# EAGLE board Cansat-2024-1 (EAGLE 9.4.2), part 1 of 2
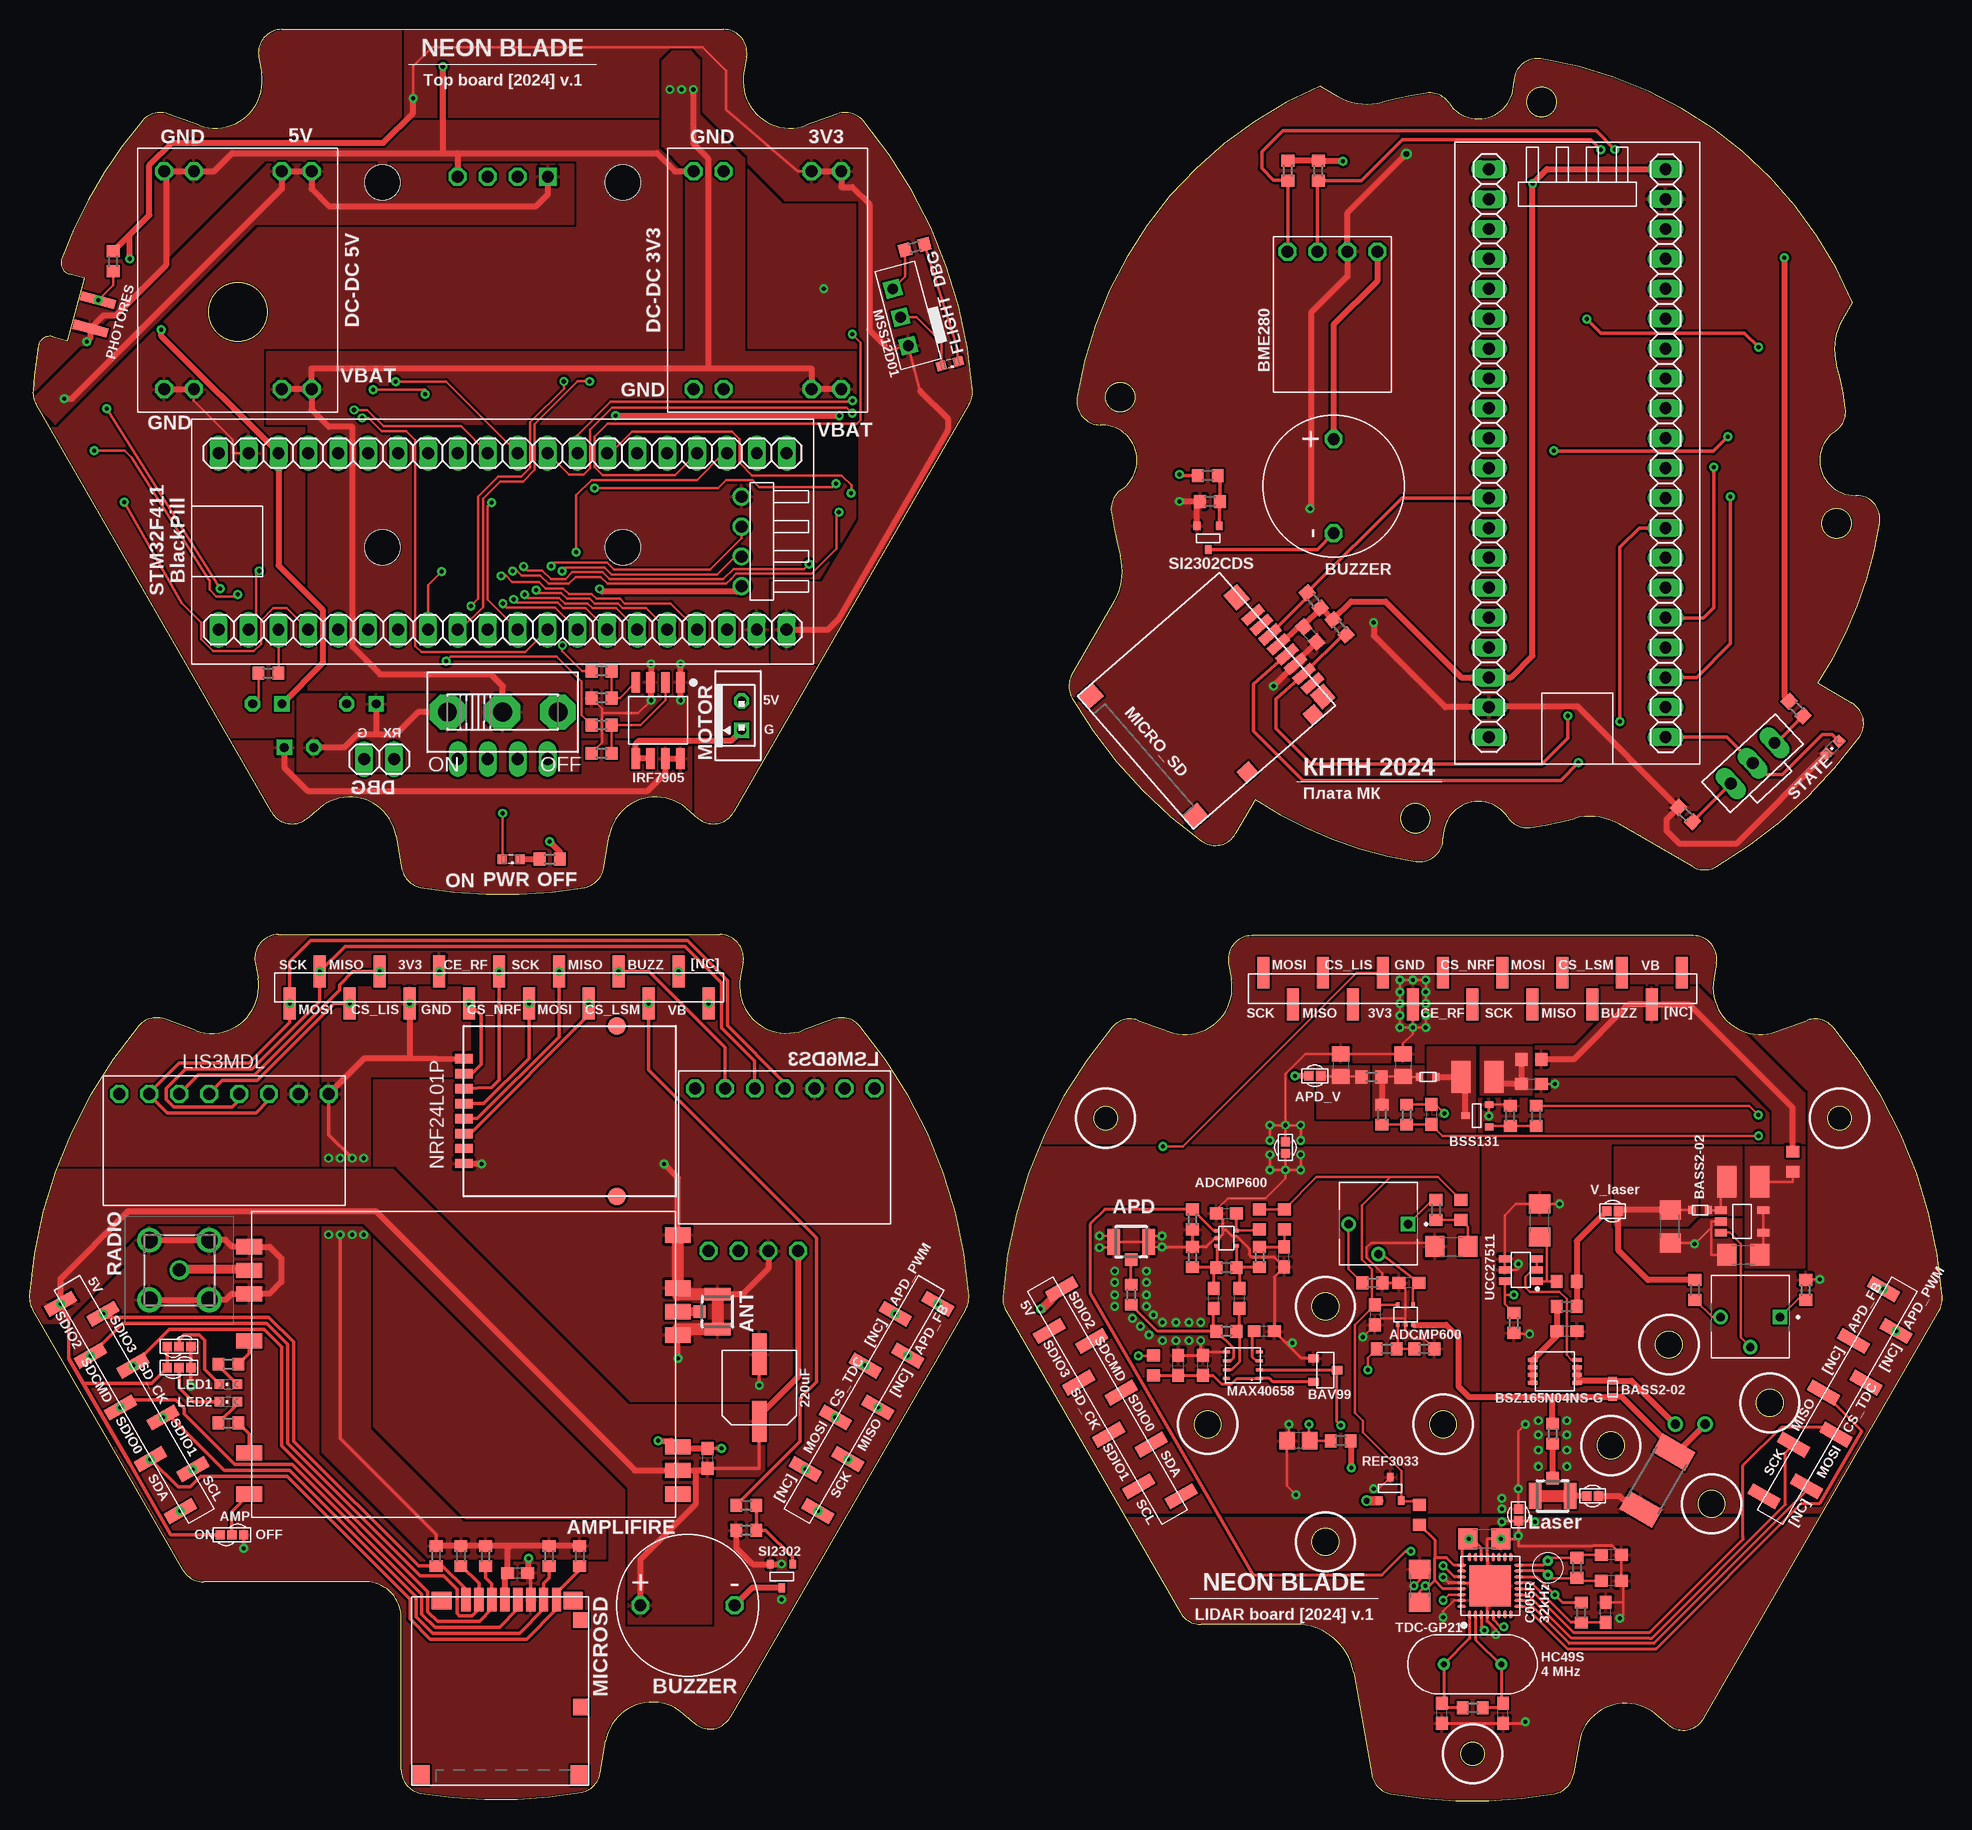
[diagram p0: board, top side]
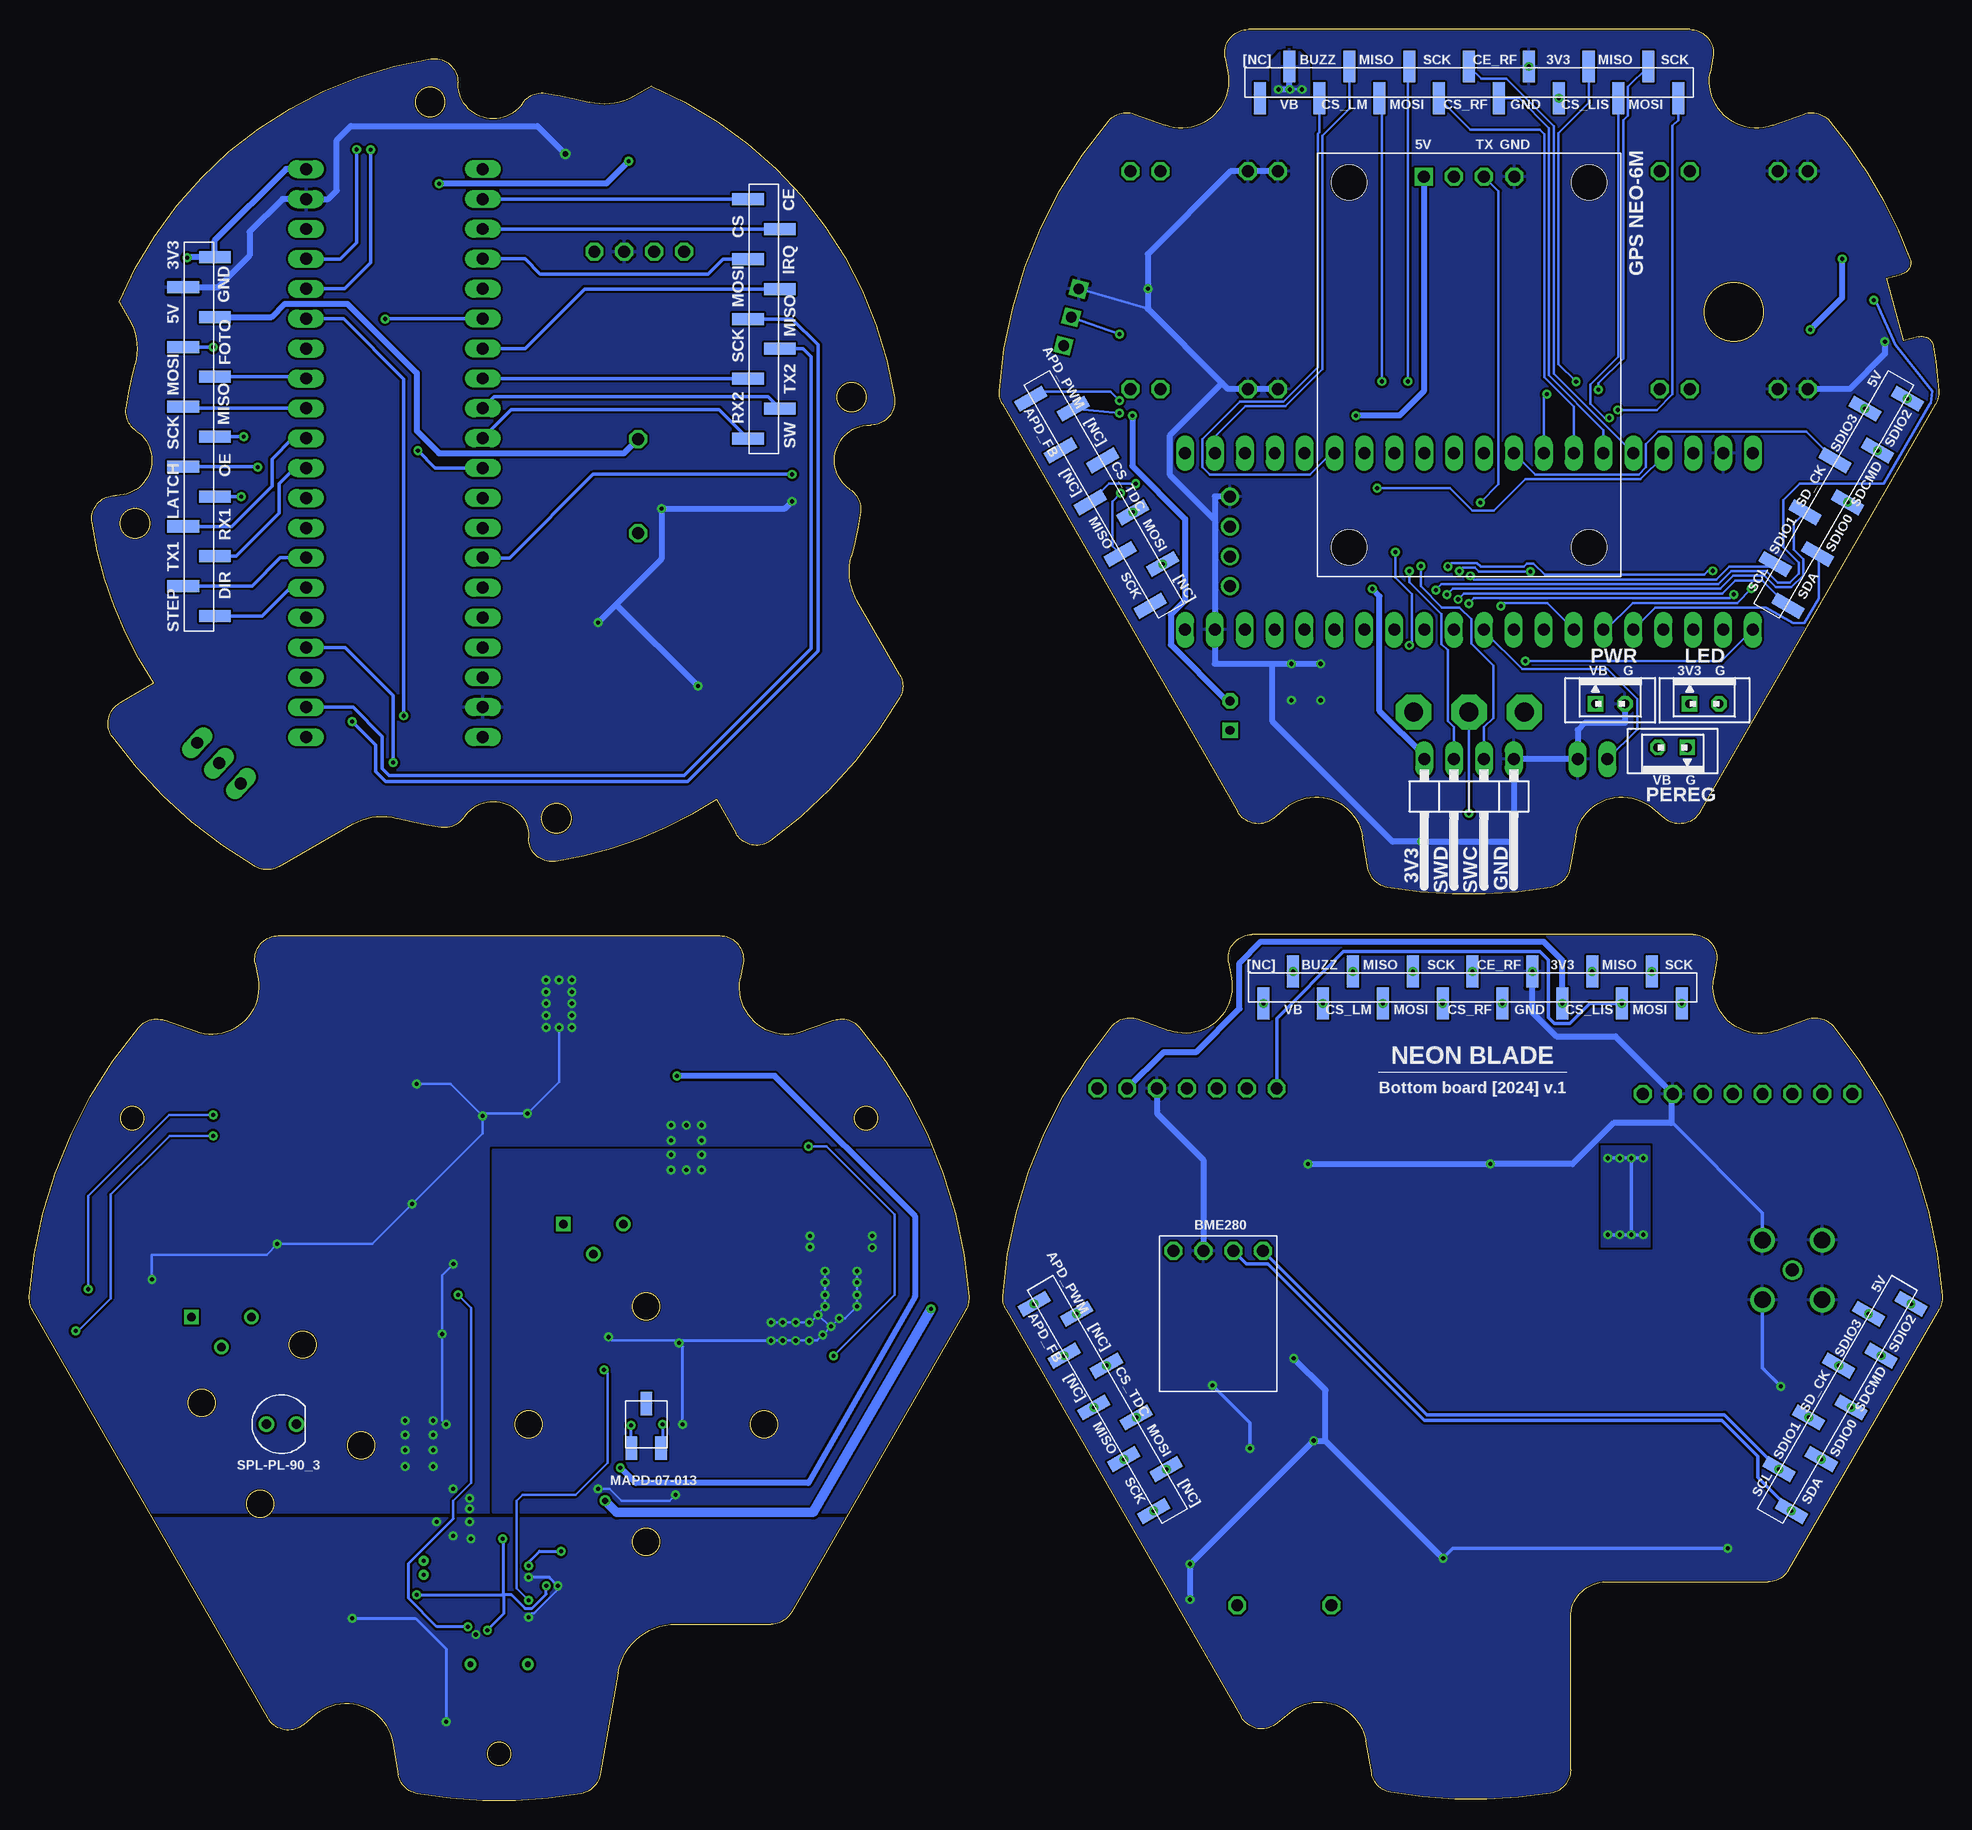
[diagram p1: board, bottom side, seen from below]

Size 162.51 x 150.48 mm. Coordinates in mm from the lower left corner, seen from the top.
Outline: 13.06,19.58 0.27,41.73 arc-34 0,42.87 arc-36 9.27,65.79 arc-70 11.48,66.38 14.11,65.43 arc120 19.42,69.88 19.18,71.23 arc-100 21.15,73.58 58.66,73.58 arc-100 60.63,71.23 60.39,69.88 arc120 65.7,65.43 68.33,66.38 arc-70 70.55,65.79 arc-36 79.81,42.87 arc-34 79.55,41.73 59.54,7.08 arc-100 56.52,6.55 55.47,7.43 arc120 48.96,5.06 48.48,2.31 arc-70 46.86,0.68 arc-20 33.24,0.63 arc-80 31.57,2.61 31.57,15.58 arc90 28.57,18.58 14.79,18.58 arc-60 13.06,19.58
Outline: 3.27,124.02 4.7,129.34 3.42,129.68 arc-96 2.74,131 arc-19 9.57,142.69 arc-70 11.78,143.28 14.41,142.33 arc120 19.72,146.78 19.48,148.13 arc-100 21.45,150.48 58.96,150.48 arc-100 60.93,148.13 60.69,146.78 arc120 66,142.33 68.63,143.28 arc-70 70.85,142.69 arc-36 80.11,119.77 arc-34 79.85,118.63 59.84,83.98 arc-100 56.82,83.45 55.77,84.33 arc120 49.26,81.96 48.78,79.21 arc-70 47.16,77.58 arc-20 33.26,77.58 arc-70 31.63,79.21 31.15,81.96 arc120 24.64,84.33 23.59,83.45 arc-100 20.57,83.98 0.57,118.63 arc-34 0.3,119.77 arc-5 0.75,123.57 arc-96 2,124.37 3.27,124.02
Outline: 82.97,41.63 97.78,15.98 arc60 99.51,14.98 107.59,14.98 arc-80 112.51,10.84 114.03,2.21 arc70 115.66,0.58 arc20 129.56,0.58 arc70 131.18,2.21 131.66,4.96 arc-120 138.17,7.33 139.22,6.45 arc100 142.24,6.98 162.25,41.63 arc34 162.51,42.77 arc36 153.25,65.69 arc70 151.03,66.28 148.4,65.33 arc-120 143.09,69.78 143.33,71.13 arc100 141.36,73.48 103.85,73.48 arc100 101.88,71.13 102.12,69.78 arc-120 96.81,65.33 94.18,66.28 arc70 91.97,65.69 arc36 82.7,42.77 arc34 82.97,41.63
Outline: 88.58,95.68 92.18,101.92 arc45 92.68,105.71 arc-7 91.92,109.45 arc-64 92.78,111.39 arc146 91.11,116.88 90.99,116.88 arc-99 89.02,119.18 arc-58 109.67,145.65 111.15,144.8 arc45 114.94,144.3 arc-7 118.68,145.06 arc-64 120.62,144.2 arc146 126.11,145.88 126.11,145.99 arc-99 128.41,147.96 arc-58 154.88,127.31 154.03,125.84 arc45 153.53,122.04 arc-7 154.29,118.3 arc-64 153.43,116.36 arc146 155.11,110.88 155.22,110.88 arc-99 157.2,108.57 arc-24 151.93,94.92 154.83,93.25 arc-96 155.45,90.34 arc-24 143.32,79.36 arc-60 141.31,79.35 135.07,82.95 arc45 131.27,83.45 arc-7 127.53,82.69 arc-64 125.59,83.55 arc146 120.11,81.88 120.11,81.76 arc-99 117.8,79.79 arc-24 104.15,85.05 102.48,82.15 arc-96 99.57,81.53 arc-24 88.59,93.67 arc-60 88.58,95.68
Outline: circle at 17.71,126.48 radius 2.5
Outline: circle at 100.11,31.98 radius 1.15
Outline: circle at 120.11,31.98 radius 1.15
Outline: circle at 110.11,21.98 radius 1.15
Outline: circle at 110.11,41.98 radius 1.15
Outline: circle at 91.43,57.98 radius 1
Outline: circle at 147.87,33.79 radius 1.15
Outline: circle at 134.35,30.16 radius 1.15
Outline: circle at 142.92,25.21 radius 1.15
Outline: circle at 122.61,3.98 radius 1
Outline: circle at 139.3,38.74 radius 1.15
Outline: circle at 153.78,57.98 radius 1
Outline: circle at 153.54,108.51 radius 1.25
Outline: circle at 117.74,83.45 radius 1.25
Outline: circle at 92.68,119.24 radius 1.25
Outline: circle at 128.47,144.31 radius 1.25
Copper layers (1*16): Top 0.035mm / dielectric 1.5mm / Bottom 0.035mm
Design rules "default *": minimum track width 0.2mm, minimum drill 0.35mm, track to track 0.2mm, track to pad 0.2mm, pad to pad 0.2mm, via to via 0.2mm, smd to smd 0.2mm, copper to edge 0.1mm, drill to drill 0.00508125mm, minimum pad ring 10mil, minimum via ring 8mil, stop-mask expansion 4mil, vias tented up to drill 0mil, thermal gap 10mil

## Footprints (pad centres in the part's own frame; a part is rotated, then mirrored left to right if it is on the bottom)
XQ-02A = smd 2.2 x 1.3: P$1 -18.2,-11; P$2 -18.2,-6.5; P$3 -18.2,-4.5; P$4 -18.2,-2.5; P$5 -18.2,9; P$6 -18.2,11; P$7 18.2,11; P$8 18.2,7.5; P$9 18.2,-2; P$10 18.2,-6; P$11 18.2,-8; P$12 18.2,-10; P$13 -18.2,7
U.FL-R-SMT-1(10) = smd 1.05 x 2.2: 1 -1.475,0; 2 1.475,0 | smd 1.05 x 1.05: 3 0,1.525
BME280-PINS-ONLY = drill 1.016 octagon: P$1 -3.81,5.33; P$2 -1.27,5.33; P$3 1.27,5.33; P$4 3.81,5.33
BUZZER-S8R12 = drill 1 octagon: P$1 -4,0; P$2 4,0
C0603 = smd 1.1 x 1: 1 -0.85,0; 2 0.85,0
C1206 = smd 1.6 x 1.8: 1 -1.4,0; 2 1.4,0
C0805 = smd 1.3 x 1.5: 1 -0.95,0; 2 0.95,0
ECAP220-CMD = smd 1.2 x 3.5: P$1 0,2.85; P$2 0,-2.85
SOD523 = smd 0.7 x 0.6: P$1 0,-0.7; P$2 0,0.7
BAV99 = smd 0.7 x 0.9: P$1 -1,-1; P$2 1,-1; P$3 0,1
MP1584-B = drill 1.016 octagon: P$1 1.95,2.23; P$2 1.95,4.77; P$3 1.95,12.23; P$4 1.95,14.77; P$5 20.45,14.77; P$6 20.45,12.23; P$7 20.45,4.77; P$8 20.45,2.23
1X04/90 = drill 1.016 long: 1 -3.81,-3.81; 2 -1.27,-3.81; 3 1.27,-3.81; 4 3.81,-3.81
1X02 = drill 1.016 long: 1 -1.27,0; 2 1.27,0
L_BEAD = smd 1 x 1.1: 1 -0.85,0; 2 0.85,0
L_1210 = smd 1.6 x 2.7: 1 -1.4,0; 2 1.4,0
1210 = smd 1.6 x 2.7: 1 -1.4,0; 2 1.4,0
CHIPLED_0603 = smd 0.8 x 0.8: A 0,-0.75; C 0,0.75
SML0603 = smd 0.8 x 0.8: A 0.75,0; C -0.75,0
LIS3MDL-CGMSU-NB2023-1 = drill 1.016 octagon: P$1 -8.89,-4; P$2 -6.35,-4; P$3 -3.81,-4; P$4 -1.27,-4; P$5 1.27,-4; P$6 3.81,-4; P$7 6.35,-4; P$8 8.89,-4
LSM6DS3-GY-NB2023 = drill 1.016 octagon: P$1 -7.62,-5; P$2 -5.08,-5; P$3 -2.54,-5; P$4 0,-5; P$5 2.54,-5; P$6 5.08,-5; P$7 7.62,-5
SD = smd 0.8 x 2: CLK 6,-15.77; CMD 8.2,-15.77; DAT0 3.8,-15.77; DAT1 2.7,-15.77; DAT2 10.4,-15.77; DAT3 9.3,-15.77; VDD 7.1,-15.77; VSS 4.9,-15.77 | smd 1.5 x 1.7: P$9 0.75,-0.85; P$13 14.25,-0.85 | smd 1.6 x 1.5: P$10 1.3,-15.7 | smd 1.29 x 1.3: P$11 0.645,-14.05 | smd 1.29 x 1.4: P$12 0.645,-6.65 | smd 1.7 x 1.5: P$14 12.45,-15.7
NRF24L01_ML01SP4 = smd 1.5 x 0.8: P$1 -9,4.445; P$2 -9,3.175; P$3 -9,1.905; P$4 -9,0.635; P$5 -9,-0.635; P$6 -9,-1.905; P$7 -9,-3.175; P$8 -9,-4.445 | smd 1.5 x 1.5: P$9 4,7.25; P$10 4,-7.25
PHOTORES_VT93N1_SMD = smd 0.8 x 3: P$1 -1.25,0; P$2 1.25,0
R0603 = smd 1 x 1.1: 1 -0.85,0; 2 0.85,0
R2512 = smd 1.8 x 3.2: 1 -2.8,0; 2 2.8,0
MCXJPHSTTH1 = drill 1.1 pad 1.65: 1 0,0 | drill 1.4 pad 2.1: 2 -2.54,2.54; 3 -2.54,-2.54; 4 2.54,-2.54; 5 2.54,2.54
SOT23-3 = smd 0.56 x 0.73: 1 -0.95,-1; 2 0.95,-1; 3 0,1
UNICS-SWITCH = drill 1.6 pad 3 octagon: 1 -4.7,0; 2 0,0; 3 4.7,0
STM32F411_BOARD = drill 1.016 long: 1 24.13,7.5; 2 21.59,7.5; 3 19.05,7.5; 4 16.51,7.5; 5 13.97,7.5; 6 11.43,7.5; 7 8.89,7.5; 8 6.35,7.5; 9 3.81,7.5; 10 1.27,7.5; 11 -1.27,7.5; 12 -3.81,7.5; 13 -6.35,7.5; 14 -8.89,7.5; 15 -11.43,7.5; 16 -13.97,7.5; 17 -16.51,7.5; 18 -19.05,7.5; 19 -21.59,7.5; 20 -24.13,7.5; 21 -24.13,-7.5; 22 -21.59,-7.5; 23 -19.05,-7.5; 24 -16.51,-7.5; 25 -13.97,-7.5; 26 -11.43,-7.5; 27 -8.89,-7.5; 28 -6.35,-7.5; 29 -3.81,-7.5; 30 -1.27,-7.5; 31 1.27,-7.5; 32 3.81,-7.5; 33 6.35,-7.5; 34 8.89,-7.5; 35 11.43,-7.5; 36 13.97,-7.5; 37 16.51,-7.5; 38 19.05,-7.5; 39 21.59,-7.5; 40 24.13,-7.5
PBS_SMD_X9 = smd 1.02 x 2.7: 1 -10.16,1.35; 2 -7.62,-1.35; 3 -5.08,1.35; 4 -2.54,-1.35; 5 0,1.35; 6 2.54,-1.35; 7 5.08,1.35; 8 7.62,-1.35; 9 10.16,1.35
PBD_SMD_X15 = smd 1.02 x 2.7: 1 -17.78,1.35; 2 -15.24,-1.35; 3 -12.7,1.35; 4 -10.16,-1.35; 5 -7.62,1.35; 6 -5.08,-1.35; 7 -2.54,1.35; 8 0,-1.35; 9 2.54,1.35; 10 5.08,-1.35; 11 7.62,1.35; 12 10.16,-1.35; 13 12.7,1.35; 14 15.24,-1.35; 15 17.78,1.35
VIAS-SELECT = smd 0.8 x 0.8: 1 -0.5,0; 2 0.5,0; 3 1.5,0
STM32F401_BOARD = drill 1.016 long: 1 24.13,7.5; 2 21.59,7.5; 3 19.05,7.5; 4 16.51,7.5; 5 13.97,7.5; 6 11.43,7.5; 7 8.89,7.5; 8 6.35,7.5; 9 3.81,7.5; 10 1.27,7.5; 11 -1.27,7.5; 12 -3.81,7.5; 13 -6.35,7.5; 14 -8.89,7.5; 15 -11.43,7.5; 16 -13.97,7.5; 17 -16.51,7.5; 18 -19.05,7.5; 19 -21.59,7.5; 20 -24.13,7.5; 21 -24.13,-7.5; 22 -21.59,-7.5; 23 -19.05,-7.5; 24 -16.51,-7.5; 25 -13.97,-7.5; 26 -11.43,-7.5; 27 -8.89,-7.5; 28 -6.35,-7.5; 29 -3.81,-7.5; 30 -1.27,-7.5; 31 1.27,-7.5; 32 3.81,-7.5; 33 6.35,-7.5; 34 8.89,-7.5; 35 11.43,-7.5; 36 13.97,-7.5; 37 16.51,-7.5; 38 19.05,-7.5; 39 21.59,-7.5; 40 24.13,-7.5 | drill 1.016: 3V3 20.3,-3.81; GND 20.3,3.81; SWC 20.3,1.27; SWD 20.3,-1.27
MSS12D01 = drill 0.9 square: P$1 0,0; P$2 2.5,0; P$3 -2.5,0
GPS_NEO6M_NEW = drill 1.016 square: P$1 -16,-3.84 | drill 1.016 octagon: P$2 -16,-1.27; P$3 -16,1.27; P$4 -16,3.84 | hole 3: -15.5,-10.2; -15.5,10.2; 15.5,-10.2; 15.5,10.2
SO8 = smd 0.72 x 1.78: 1 -1.905,-3.23; 2 -0.635,-3.23; 3 0.635,-3.23; 4 1.905,-3.23; 5 1.905,3.23; 6 0.635,3.23; 7 -0.635,3.23; 8 -1.905,3.23
TDC-GP21 = smd 0.75 x 0.25: 1 -2.425,1.75; 2 -2.425,1.25; 3 -2.425,0.75; 4 -2.425,0.25; 5 -2.425,-0.25; 6 -2.425,-0.75; 7 -2.425,-1.25; 8 -2.425,-1.75; 17 2.425,-1.75; 18 2.425,-1.25; 19 2.425,-0.75; 20 2.425,-0.25; 21 2.425,0.25; 22 2.425,0.75; 23 2.425,1.25; 24 2.425,1.75 | smd 0.25 x 0.75: 9 -1.75,-2.425; 10 -1.25,-2.425; 11 -0.75,-2.425; 12 -0.25,-2.425; 13 0.25,-2.425; 14 0.75,-2.425; 15 1.25,-2.425; 16 1.75,-2.425; 25 1.75,2.425; 26 1.25,2.425; 27 0.75,2.425; 28 0.25,2.425; 29 -0.25,2.425; 30 -0.75,2.425; 31 -1.25,2.425; 32 -1.75,2.425 | smd 3.5 x 3.5: P$1 0,0
C005R = drill 0.35 pad 0.85: P$1 0,0.6; P$2 0,-0.6
HC49S = drill 0.5: P$1 -2.44,0; P$2 2.44,0
MIC2288 = smd 0.66 x 1: EN -0.95,-1.8; FB -0.95,1.8; GND 0,1.8; SW 0.95,1.8; VIN 0.95,-1.8
UCC27511DBVR = smd 1.05 x 0.6: P$1 -1.35,0.95; P$2 -1.35,0; P$3 -1.35,-0.95; P$4 1.35,-0.95; P$5 1.35,0; P$6 1.35,0.95
BSZ165N04NS-G = smd 0.8 x 0.34: P$1 -1.9,0.98; P$2 -1.9,0.33; P$3 -1.9,-0.33; P$4 -1.9,-0.98; P$5 1.9,-0.98; P$6 1.9,-0.33; P$7 1.9,0.33; P$8 1.9,0.98
SPL_PL-90 = drill 0.8: P$1 1.27,0; P$2 -1.27,0
ADCMP600 = smd 0.3 x 0.425: P$1 -0.65,-0.825; P$2 0,-0.825; P$3 0.65,-0.825; P$4 0.65,0.825; P$5 -0.65,0.825
MAX40658-8-TDFN-3X3MM = smd 0.25 x 0.6: P$1 -1.125,-1.4; P$2 -0.375,-1.4; P$3 0.375,-1.4; P$4 1.125,-1.4; P$5 1.125,1.4; P$6 0.375,1.4; P$7 -0.375,1.4; P$8 -1.125,1.4
MAPD-07-013 = smd 1 x 2: P$1 0,1.75; P$2 -1.27,-2.05; P$3 1.27,-2.05
VIAS-CONNECT = smd 0.8 x 0.8: 1 -0.5,0; 2 0.5,0
SWITCH_MSS = drill 1.016 long: 1 -2.54,0; 2 0,0; 3 2.54,0
PBD_SMD_X13 = smd 1.02 x 2.7: 1 -15.24,1.35; 2 -12.7,-1.35; 3 -10.16,1.35; 4 -7.62,-1.35; 5 -5.08,1.35; 6 -2.54,-1.35; 7 0,1.35; 8 2.54,-1.35; 9 5.08,1.35; 10 7.62,-1.35; 11 10.16,1.35; 12 12.7,-1.35; 13 15.24,1.35
TRIM_3362P-1-502LF = drill 0.714 square: 1 -2.54,0 | drill 0.714: 2 0,2.54; 3 2.54,0
B2B-PH-K-S = drill 0.75 pad 1.3 square: 1 1.25,0 | drill 0.75 pad 1.3 octagon: 2 -1.25,0

## Placement (x,y rotation side)
AMPLIFIRE  XQ-02A  [XQ-02A]  36.89,37.05 180 top
ANT  U.FL-R-SMT-1_10_  [U.FL-R-SMT-1(10)]  58.46,41.54 90 top
BME280  BME280BME280-PINS-ONLY  [BME280-PINS-ONLY]  110.71,126.28 0 top
BUZZER  BUZZERS8R6  [BUZZER-S8R12]  55.91,16.58 0 top
BUZZER1  BUZZERS8R6  [BUZZER-S8R12]  110.81,111.68 90 top
C1  100nF  [C0603]  57.61,29.09 270 top
C2  15pF  [C0603]  125.21,7.43 90 top
C3  15pF  [C0603]  120.01,7.43 90 top
C4  10uF  [C1206]  145.61,46.38 0 top
C5  10nF 250v  [C0805]  116.71,62.48 270 top
C6  1uF  [C0603]  127.61,60.88 0 top
C7  100nF  [C0603]  41.49,19.33 180 top
C8  100pF  [C0603]  119.11,58.28 270 top
C9  10uF  [C1206]  139.41,48.78 90 top
C10  220uF  [ECAP220-CMD]  62.01,35.08 180 top
C11  10nF 250V  [C0805]  111.41,62.48 270 top
C12  100nF  [C0603]  99.71,36.98 90 top
C13  1uF  [C0603]  97.61,36.98 90 top
C14  1uF  [C0603]  104.91,39.88 0 top
C15  10nF  [C0603]  102.81,42.68 90 top
C16  10uF  [C1206]  128.31,49.28 90 top
C17  22nF low ESR  [C0603]  130.61,39.88 180 top
C18  22uF  [C1206]  118.12,18.24 270 top
C19  10uF  [C1206]  120.81,47.08 0 top
C20  22uF  [C1206]  123.61,22.23 180 top
C21  10pF  [C0603]  134.41,18.68 180 top
C22  10pF  [C0603]  134.41,20.88 180 top
C23  100nF  [C0603]  117.21,43.98 180 top
C24  100nF  [C0603]  114.31,41.28 270 top
C25  10nF  [C0603]  100.61,42.68 90 top
C26  1uF  [C0603]  106.61,46.18 90 top
C27  100nF  [C0603]  101.71,49.88 0 top
C28  100nF  [C0603]  108.81,99.08 131 top
C29  100nF  [C0603]  133.92,15.98 90 top
C33  10nF 250V  [C0805]  107.81,30.58 180 top
D1  BAS521  [SOD523]  118.81,61.48 270 top
D2  BAS52-02  [SOD523]  141.94,50.18 270 top
D6  BAV99  [BAV99]  110.11,36.58 270 top
DC-DC_3V3  MP1584-B  [MP1584-B]  71.21,117.98 90 top
DC-DC_5V  MP1584-B  [MP1584-B]  26.21,117.98 90 top
J1  U.FL-R-SMT-1_10_  [U.FL-R-SMT-1(10)]  93.61,47.48 180 top
J2  U.FL-R-SMT-1_10_  [U.FL-R-SMT-1(10)]  129.41,25.88 0 top
JP1  [1X04/90]  40.21,84.68 180 bottom
JP2  [1X02]  29.71,88.48 0 top
L1  L_BEAD  [L_BEAD]  95.51,36.98 270 top
L2  L_BEAD  [L_BEAD]  149.81,54.28 90 top
L3  10uH  [L_1210]  145.61,52.58 180 top
L4  L_BEAD  [L_BEAD]  127.61,62.98 180 top
L5  47uH  [1210]  123.01,61.48 180 top
L6  L_BEAD  [L_BEAD]  106.61,49.38 270 top
L7  L_BEAD  [L_BEAD]  104.51,49.38 270 top
L8  L_BEAD  [L_BEAD]  130.61,44.11 180 top
L9  L_BEAD  [L_BEAD]  118.1,24.28 90 top
L10  L_BEAD  [L_BEAD]  121.61,50.18 270 top
LED1  [CHIPLED_0603]  16.91,33.88 90 top
LED2  [CHIPLED_0603]  16.91,35.38 90 top
LED7  [SML0603]  40.91,79.98 180 top
LED8  [SML0603]  78.21,122.08 195 top
LIS3MDL  LIS3MDL-CJMCUбез_отв.  [LIS3MDL-CGMSU-NB2023-1]  16.54,56.05 180 top
LSM6DS3  LSM6DS3-GY-NB2023  [LSM6DS3-GY-NB2023]  64.17,55.49 180 bottom
MICRO_SD  SD  [SD]  98.89,82.53 131 top
MICROSD  SD  [SD]  47.49,1.3 180 top
NRF24L01P  NRF24L01_ML01SP4  [NRF24L01_ML01SP4]  45.91,58.58 0 top
PHOTORES  PHOTORES_VT93N1  [PHOTORES_VT93N1_SMD]  5.51,126.28 75 top
R1  2k  [R0603]  16.91,32.08 180 top
R2  3k3  [R0603]  34.56,20.78 90 top
R3  2k  [R0603]  16.91,37.08 180 top
R4  2k  [R0603]  75.21,131.98 195 top
R5  5K1  [R0603]  44.21,79.98 0 top
R6  2k  [R0603]  20.31,95.78 180 top
R7  3k3  [R0603]  36.66,20.78 90 top
R8  3k3  [R0603]  38.76,20.78 90 top
R9  3k3  [R0603]  44.16,20.78 90 top
R10  3k3  [R0603]  46.76,20.78 90 top
R11  10k  [R0603]  48.61,88.98 0 top
R12  10k  [R0603]  48.61,93.68 180 top
R13  100  [R0603]  48.61,91.38 0 top
R14  100  [R0603]  48.61,95.98 0 top
R15  4.7k  [R0603]  131.84,15.98 90 top
R16  560k  [R0603]  122.61,7.88 180 top
R17  2k  [R0603]  7.11,130.78 270 top
R18  47k  [R0603]  141.51,43.38 270 top
R19  4.7k  [R0603]  150.91,43.38 90 top
R20  47k  [R0603]  125.81,58.18 270 top
R21  100R  [R0603]  128.01,58.18 90 top
R22  2M  [R0603]  114.91,58.28 90 top
R23  20k  [R0603]  117.01,58.28 270 top
R24  10M  [R0603]  131.48,19.78 270 top
R25  4.7k  [R0603]  114.01,61.48 0 top
R26  1k  [R0603]  126.11,40.58 90 top
R27  270  [R0603]  130.61,41.98 0 top
R28  R100  [R2512]  138.31,27.18 60 top
R29  47R  [R0603]  129.41,31.18 90 top
R30  100R  [R0603]  60.91,25.08 0 top
R31  10k  [R0603]  60.91,22.98 180 top
R32  4.7k  [R0603]  114.11,43.98 180 top
R33  100k  [R0603]  119.51,50.18 270 top
R34  0R  [R0603]  115.31,38.38 0 top
R35  1k  [R0603]  118.51,38.38 180 top
R36  NC  [R0603]  101.71,39.88 0 top
R37  47R  [R0603]  93.61,42.98 270 top
R38  1k  [R0603]  111.41,30.58 0 top
R39  1k  [R0603]  98.81,49.38 90 top
R40  150R  [R0603]  101.71,45.28 180 top
R41  4.7k  [R0603]  104.51,46.18 270 top
R42  4k7  [R0603]  98.81,46.18 90 top
R43  10k  [R0603]  100.31,110.38 180 top
R44  100R  [R0603]  100.11,112.58 0 top
R45  2k  [R0603]  140.71,83.78 135 top
R46  2k  [R0603]  150.11,92.78 134 top
R47  5k1  [R0603]  106.91,138.48 90 top
R48  5k1  [R0603]  109.51,138.48 90 top
R49  10k  [R0603]  111.31,99.68 311 top
R50  10k  [R0603]  109.11,101.98 131 top
RADIO  MCX-J-P-H-ST-TH1  [MCXJPHSTTH1]  12.74,45.08 0 top
REF3033  REF3033  [SOT23-3]  115.61,26.48 0 top
S2  [UNICS-SWITCH]  40.21,92.48 0 top
SI2302  MOSFET-N  [SOT23-3]  63.91,19.08 180 top
SI2302CDS  SI2302CDS  [SOT23-3]  100.14,107.28 180 top
STATE  [CHIPLED_0603]  153.21,89.48 135 top
STM  STM32F411_BOARD  [STM32F411_BOARD]  131.51,114.48 90 top
U$1  BME280BME280-PINS-ONLY  [BME280-PINS-ONLY]  61.51,41.37 0 bottom
U$2  PBS_SMD_X9  [PBS_SMD_X9]  8.91,34.08 120 top
U$3  PBS_SMD_X9  [PBS_SMD_X9]  70.91,34.08 240 top
U$4  PBS_SMD_X15  [PBD_SMD_X15]  39.91,69.08 180 bottom
U$5  VIAS-SELECT  [VIAS-SELECT]  13.21,36.78 180 top
U$6  PBS_SMD_X9  [PBS_SMD_X9]  8.91,34.08 240 bottom
U$7  PBS_SMD_X9  [PBS_SMD_X9]  70.91,34.08 120 bottom
U$8  PBS_SMD_X15  [PBD_SMD_X15]  39.91,69.08 180 top
U$9  VIAS-SELECT  [VIAS-SELECT]  13.21,38.58 180 top
U$10  VIAS-SELECT  [VIAS-SELECT]  17.71,22.58 180 top
U$11  STM32F401_BOARD  [STM32F401_BOARD]  40.21,106.98 0 top
U$12  MSS12D01  [MSS12D01]  74.01,126.03 285 top
U$13  PBS_SMD_X9  [PBS_SMD_X9]  71.21,110.98 120 bottom
U$14  PBS_SMD_X9  [PBS_SMD_X9]  9.21,110.98 240 bottom
U$15  PBS_SMD_X15  [PBD_SMD_X15]  40.21,145.98 180 bottom
U$16  GPS_NEO6M  [GPS_NEO6M_NEW]  40.21,121.98 270 bottom
U$17  IRF7905PBF  [SO8]  53.41,91.78 180 top
U$18  TDC-GP21  [TDC-GP21]  124.11,18.25 90 top
U$19  C005R  [C005R]  129.01,19.78 0 top
U$20  HC49S  [HC49S]  122.61,11.58 180 top
U$21  MIC2288  [MIC2288]  145.51,49.21 90 top
U$22  BSS131  [SOT23-3]  123.01,58.18 90 top
U$23  PBS_SMD_X9  [PBS_SMD_X9]  153.61,33.98 60 top
U$24  PBS_SMD_X9  [PBS_SMD_X9]  91.61,33.98 300 top
U$25  PBS_SMD_X15  [PBD_SMD_X15]  122.61,68.98 0 top
U$26  UCC27511DBVR  [UCC27511DBVR]  126.71,45.08 180 top
U$27  BSZ165N04NS-G  [BSZ165N04NS-G]  129.61,36.48 180 top
U$28  BAS52-02  [SOD523]  134.51,34.98 180 top
U$29  SPL_PL-90  [SPL_PL-90]  141.11,31.98 0 bottom
U$30  ADCMP600  [ADCMP600]  116.91,41.28 0 top
U$31  MAX40658-8-TDFN-3X3MM  [MAX40658-8-TDFN-3X3MM]  103.11,36.98 90 top
U$32  ADCMP600  [ADCMP600]  101.71,47.78 270 top
U$33  MTAPD-07-013  [MAPD-07-013]  110.11,31.98 0 bottom
U$34  [VIAS-CONNECT]  109.21,61.58 180 top
U$35  [VIAS-CONNECT]  134.51,50.08 180 top
U$36  SWITCH_MSS  [SWITCH_MSS]  146.41,88.13 223 top
U$37  PBS_SMD_X13  [PBD_SMD_X13]  148.11,115.88 270 bottom
U$38  PBS_SMD_X9  [PBS_SMD_X9]  100.11,125.88 90 bottom
U$39  Плата МК  [LOGO]  107.71,86.58 0 top
VR1  3362P-1-502LF  [TRIM_3362P-1-502LF]  146.21,41.08 180 top
VR2  3362P-1-502LF  [TRIM_3362P-1-502LF]  114.61,48.98 180 top
W1  [VIAS-CONNECT]  126.51,24.28 270 top
W3  [VIAS-CONNECT]  132.81,25.88 180 top
W5  [VIAS-CONNECT]  106.71,55.48 90 top
X1  JST-2-K-S  [B2B-PH-K-S]  28.21,93.18 180 bottom
X2  JST-2-K-S  [B2B-PH-K-S]  20.21,93.18 180 bottom
X3  JST-2-K-S  [B2B-PH-K-S]  60.51,92.18 270 top
X4  JST-2-K-S  [B2B-PH-K-S]  22.91,89.48 0 bottom

## Library data of the parts
AMPLIFIRE BUZZER C10 DC-DC_3V3 DC-DC_5V LIS3MDL LSM6DS3 MICROSD NRF24L01P PHOTORES SI2302 U$12 = NEON-BLADE-2023
ANT J1 J2 = U.FL-R-SMT-1_10_; ARROW_PART_NUMBER: U.FL-R-SMT-1(10); ARROW_PRICE-STOCK: https://www.arrow.com/en/products/u.fl-r-smt-1-10/hirose-electric; DESCRIPTION: UFL SMT PCB receptable,DC-6GHz Hirose Straight 50 Surface Mount UFL Connector, Receptacle, Solder Termination Coaxial; HEIGHT: mm; MANUFACTURER_NAME: Hirose; MANUFACTURER_PART_NUMBER: U.FL-R-SMT-1(10); MOUSER_PART_NUMBER: 798-U.FL-R-SMT-110; MOUSER_PRICE-STOCK: https://www.mouser.co.uk/ProductDetail/Hirose-Connector/U.FL-R-SMT-110?qs=kL1ClTr6oBoOdtqlGQpQrQ%3D%3D
BME280 MICRO_SD STM U$36-U$39 = UNKNOWN-2024
BUZZER1 SI2302CDS = CanCubeSat
C1-C9 C11-C29 C33 = rcl; SPICEPREFIX: C
D1 D2 D6 L1-L10 REF3033 U$1-U$11 U$13-U$35 W1 W3 W5 X1-X4 = NEON-BLADE-2024
JP1 JP2 = pinhead
LED1 LED2 LED7 LED8 STATE = led
R1-R50 = rcl; SPICEPREFIX: R
RADIO = MCX-J-P-H-ST-TH1; ARROW_PART_NUMBER: MCX-J-P-H-ST-TH1; ARROW_PRICE-STOCK: https://www.arrow.com/en/products/mcx-j-p-h-st-th1/samtec?region=nac; DESCRIPTION: Samtec MCXSeries, Through Hole MCX Jack jack, 50 Impedance, Solder Termination, 0 6GHz, Coaxial cable type; HEIGHT: 5.81mm; MANUFACTURER_NAME: SAMTEC; MANUFACTURER_PART_NUMBER: MCX-J-P-H-ST-TH1; MOUSER_PART_NUMBER: 200-MCXJPHSTTH1; MOUSER_PRICE-STOCK: https://www.mouser.co.uk/ProductDetail/Samtec/MCX-J-P-H-ST-TH1?qs=Cqqh%252BS766wnNti0C6DXzpQ%3D%3D
S2 = cansat-lib
VR1 VR2 = NEON-BLADE-2024; AVAILABILITY: Good; DESCRIPTION: 5 kOhms 0.5W, 1/2W PC Pins Through Hole Trimmer Potentiometer Cermet 1 Turn Top Adjustment; MF: Bourns; MP: 3362P-1-502LF; PACKAGE: 3362P-1 Bourns Inc.; PRICE: None; PURCHASE-URL: https://pricing.snapeda.com/search/part/3362P-1-502LF/?ref=eda

## Nets
1MISO: LIS3MDL.P$5 LSM6DS3.P$1 U$4.3 U$8.13
1MISO1: U$11.32 U$15.3
1MOSI: LIS3MDL.P$4 LSM6DS3.P$3 U$4.2 U$8.14
1MOSI1: U$11.13 U$15.2
1SCK: LIS3MDL.P$3 LSM6DS3.P$4 U$4.1 U$8.15
1SCK1: U$11.11 U$15.1
3V1: DC-DC_3V3.P$7 DC-DC_3V3.P$8 R17.1 U$11.18 U$11.40 U$12.P$2 U$15.5 X2.1
3V2: L1.1 U$25.5
3V3: C7.2 LIS3MDL.P$1 LSM6DS3.P$6 MICROSD.VDD NRF24L01P.P$1 R2.2 R7.2 R8.2 R9.2 R10.2 U$4.5 U$8.11
3V3_REF: C24.1 L6.1 L7.1 L9.2 L10.1 REF3033.2 U$30.P$5
3V4: C28.2 MICRO_SD.VDD R46.2 R47.2 R48.2 R49.1 R50.1 STM.18 STM.40 U$37.1
4MISO: U$11.28 U$13.4
4MISO1: U$18.12 U$23.4
4MOSI: U$11.7 U$13.3
4MOSI1: U$18.11 U$23.3
4SCK: U$11.22 U$13.2
4SCK1: U$18.10 U$23.2
5MISO: NRF24L01P.P$6 U$4.11 U$8.5
5MISO1: U$11.29 U$15.11
5MOSI: NRF24L01P.P$5 U$4.10 U$8.6
5MOSI1: U$11.27 U$15.10
5SCK: NRF24L01P.P$4 U$4.9 U$8.7
5SCK1: U$11.14 U$15.9
5V: AMPLIFIRE.P$5 BUZZER.P$1 C1.2 C10.P$1 U$1.P$1 U$2.9 U$5.3 U$6.1 U$9.3 U$10.3
5V1: DC-DC_5V.P$7 DC-DC_5V.P$8 U$14.1 U$16.P$1 X3.2
5V2: REF3033.1 U$24.1
5V3: BME280.P$4 BUZZER1.P$2 U$37.3
ADC_FOTO: STM.6 U$37.4
AGND: C12.2 C13.2 C14.2 C19.1 C23.2 C24.2 C26.1 C27.1 C33.2 D6.P$1 J1.1 J1.2 R32.1 R35.1 R39.1 R42.2 REF3033.3 U$30.P$2 U$31.P$5 U$32.P$2 W5.1
APD_COMP_OUT: R39.2 U$18.27 U$32.P$1
APD_FB_VOLT: U$11.9 U$13.8
APD_FB_VOLT1: C8.2 R22.1 R23.2 U$23.8
APD_PWM: U$11.8 U$13.9
APD_PWM1: R21.2 U$23.9
APD_V: C11.2 R25.1 U$34.1
APD_V_: R38.2 U$34.2
BUZZER: R30.1 U$4.13 U$8.3
BUZZER1: U$11.6 U$15.13
BUZZER2: R44.1 STM.14
CE_NRF: NRF24L01P.P$2 U$4.7 U$8.9
CE_NRF1: U$11.15 U$15.7
CE_RADIO: STM.2 U$38.9
CMD_SD: MICRO_SD.CMD R50.2 STM.12
COMP_N: C15.2 R40.1 R41.2 U$32.P$4
COMP_P: C25.2 R40.2 R42.1 U$32.P$3
CS_LIS: LIS3MDL.P$6 U$4.4 U$8.12
CS_LIS1: U$11.10 U$15.4
CS_LSM: LSM6DS3.P$2 U$4.12 U$8.4
CS_LSM1: U$11.2 U$15.12
CS_NRF: NRF24L01P.P$3 U$4.8 U$8.8
CS_NRF1: U$11.16 U$15.8
CS_RADIO: STM.3 U$38.8
CS_TDC: U$11.17 U$13.5
CS_TDC1: U$18.9 U$23.5
D0_SD: MICRO_SD.DAT0 R49.2 STM.35
DBG_3V3: JP1.4 U$11.3V3
DBG_TX: JP2.1 U$11.30
DIR_DRIVER: STM.27 U$37.12
DRUGATEL: R14.1 U$11.3
GND: AMPLIFIRE.P$1 AMPLIFIRE.P$2 AMPLIFIRE.P$4 AMPLIFIRE.P$10 AMPLIFIRE.P$12 AMPLIFIRE.P$13 ANT.1 ANT.2 C1.1 C7.1 C10.P$2 LIS3MDL.P$2 LSM6DS3.P$5 MICROSD.VSS NRF24L01P.P$8 R31.2 RADIO.2 RADIO.3 RADIO.4 RADIO.5 SI2302.2 U$1.P$2 U$4.6 U$5.1 U$8.10 U$9.1 U$10.1
GND1: DC-DC_3V3.P$3 DC-DC_3V3.P$4 DC-DC_3V3.P$5 DC-DC_3V3.P$6 DC-DC_5V.P$3 DC-DC_5V.P$4 DC-DC_5V.P$5 DC-DC_5V.P$6 JP1.1 JP2.2 PHOTORES.P$1 R4.2 R5.2 R11.1 R12.2 U$11.19 U$11.39 U$11.GND U$12.P$3 U$15.6 U$16.P$4 U$17.1 U$17.3 X1.2
GND2: C2.1 C3.1 C18.1 C20.1 C21.1 C22.1 C29.2 U$18.4 U$18.21 U$18.28 U$18.31 U$18.P$1 W1.2
GND3: BME280.P$3 C28.1 MICRO_SD.VSS R43.2 R45.2 SI2302CDS.2 STATE.C STM.19 STM.39 U$37.2
GPS_RX: U$11.31 U$16.P$3
I_LASER: R28.2 R29.2 U$28.P$2 U$29.P$2 U$30.P$3
IRQ_RADIO: STM.4 U$38.7
LASER_COMP: R34.1 U$18.30
LASER_PULSE: R26.2 U$18.5 U$26.P$6
LATCH_SR: STM.23 U$37.9
LED: R6.1 U$11.23
MISO_RADIO: STM.28 U$38.5
MISO_SR: STM.32 U$37.6
MOSI_RADIO: STM.7 U$38.6
MOSI_SR: STM.33 U$37.5
N$1: R30.2 R31.1 SI2302.1
N$2: U$4.14 U$8.2
N$3: U$4.15 U$8.1
N$4: AMPLIFIRE.P$3 ANT.3
N$5: AMPLIFIRE.P$11 RADIO.1
N$6: U$3.8 U$7.2
N$7: U$3.7 U$7.3
N$8: U$3.6 U$7.4
N$9: U$3.5 U$7.5
N$10: U$3.4 U$7.6
N$11: U$3.3 U$7.7
N$12: U$3.9 U$7.1
N$13: LED8.C R4.1
N$14: U$3.2 U$7.8
N$15: U$3.1 U$7.9
N$16: LED1.C U$5.2
N$17: LED1.A R1.2
N$18: AMPLIFIRE.P$8 R1.1
N$19: LED2.C U$9.2
N$20: BUZZER.P$2 SI2302.3
N$21: LED2.A R3.2
N$22: AMPLIFIRE.P$9 R3.1
N$23: S2.1 X1.1 X4.2
N$24: LED7.C R5.1
N$25: U$17.5 U$17.6 X3.1
N$26: U$17.7 U$17.8 X4.1
N$27: R12.1 R14.2 U$17.4
N$28: R11.2 R13.2 U$17.2
N$29: R6.2 X2.2
N$30: C29.1 R15.1 U$18.13
N$31: C21.2 R24.2 U$18.15 U$19.P$2
N$32: C22.2 R24.1 U$18.16 U$19.P$1
N$33: C2.2 R16.1 U$18.2 U$20.P$1
N$34: C3.2 R16.2 U$18.1 U$20.P$2
N$35: C4.2 L2.1 L3.1 U$21.EN U$21.VIN
N$36: D2.P$2 L3.2 U$21.SW
N$37: U$21.FB VR1.2
N$38: R19.1 VR1.1
N$39: R18.2 VR1.3
N$40: R20.2 R21.1 U$22.1
N$41: D1.P$2 L5.2 U$22.3
N$42: C5.2 D1.P$1 R22.2 R25.2
N$43: C6.1 L4.2 L5.1
N$44: U$26.P$2 U$26.P$3 U$27.P$4
N$45: C16.1 L8.2 U$26.P$1
N$46: C17.2 R27.1 U$27.P$5 U$27.P$6 U$27.P$7 U$27.P$8
N$47: U$27.P$1 U$27.P$2 U$27.P$3 U$28.P$1 U$29.P$1
N$48: J2.3 R29.1
N$49: J2.1 J2.2 W3.2
N$50: C23.1 U$30.P$4 VR2.2
N$51: C19.2 L10.2 R33.2
N$52: R34.2 R35.2 U$30.P$1
N$53: R33.1 VR2.1
N$54: R32.2 VR2.3
N$55: D6.P$3 U$31.P$2 U$33.P$2
N$56: C14.1 U$31.P$3
N$57: C15.1 R36.2 U$31.P$7
N$58: C25.1 R36.1 R37.2 U$31.P$6
N$59: J1.3 R37.1
N$60: C33.1 R38.1 U$33.P$3
N$61: C26.2 L6.2 R41.1
N$62: C27.2 L7.2 U$32.P$5
N$63: BUZZER1.P$1 SI2302CDS.3
N$64: R43.1 R44.2 SI2302CDS.1
N$65: R45.1 U$36.3
N$66: R46.1 U$36.1
OE_SR: STM.25 U$37.8
PERESHIGATEL: R13.1 U$11.21
PGND: C4.1 C5.1 C6.2 C8.1 C9.1 C11.1 C16.2 C17.1 R19.2 R20.1 R23.1 R26.1 R28.1 U$21.GND U$22.2 U$25.6 U$26.P$4 U$26.P$5 W1.1 W3.1 W5.2
PHOTORES: PHOTORES.P$2 R17.2 U$11.36
RX1_BLE: STM.31 U$37.10
RX2_GPS: STM.9 U$38.2
SCK_RADIO: STM.22 U$38.4
SCK_SR: STM.11 U$37.7
SCL: U$1.P$3 U$2.1 U$6.9
SCL1: U$11.34 U$14.9
SCL2: BME280.P$2 R48.1 STM.36
SD_CK: MICRO_SD.CLK STM.24
SDA: U$1.P$4 U$2.2 U$6.8
SDA1: U$11.37 U$14.8
SDA2: BME280.P$1 R47.1 STM.37
SDIO_CK: MICROSD.CLK U$2.5 U$6.5
SDIO_CK1: U$11.24 U$14.5
SDIO_CMD: MICROSD.CMD R8.1 U$2.6 U$6.4
SDIO_CMD1: U$11.12 U$14.4
SDIO_DAT0: MICROSD.DAT0 R9.1 U$2.4 U$6.6
SDIO_DAT1: MICROSD.DAT1 R10.1 U$2.3 U$6.7
SDIO_DAT2: MICROSD.DAT2 R2.1 U$2.8 U$6.2
SDIO_DAT3: MICROSD.DAT3 R7.1 U$2.7 U$6.3
SDIO_DAT4: U$11.26 U$14.2
SDIO_DAT5: U$11.33 U$14.3
SDIO_DAT6: U$11.35 U$14.6
SDIO_DAT7: U$11.25 U$14.7
STATE: LED8.A U$11.4 U$12.P$1
STEP_DRIVER: STM.26 U$37.13
SW_AMP: STM.10 U$38.1
SWC: JP1.2 U$11.SWC
SWD: JP1.3 U$11.SWD
SWITCH: STATE.A STM.21 U$36.2
TX1_BLE: STM.30 U$37.11
TX2_GPS: STM.8 U$38.3
USIL_ON: AMPLIFIRE.P$7 U$10.2
V_BAT: DC-DC_3V3.P$1 DC-DC_3V3.P$2 DC-DC_5V.P$1 DC-DC_5V.P$2 LED7.A S2.2 U$15.14
V_BAT1: L2.2 L4.1 U$25.14
V_TDC: C18.2 C20.2 L9.1 R15.2 U$18.3 U$18.14 U$18.22 U$18.25 U$18.26 U$18.29
VCC_TIA: C12.1 C13.1 D6.P$2 L1.2 U$31.P$1
VLASER: C9.2 D2.P$1 R18.1 U$35.1
VLASER_: L8.1 R27.2 U$35.2